# EAGLE board topboard (EAGLE 8.5.0)
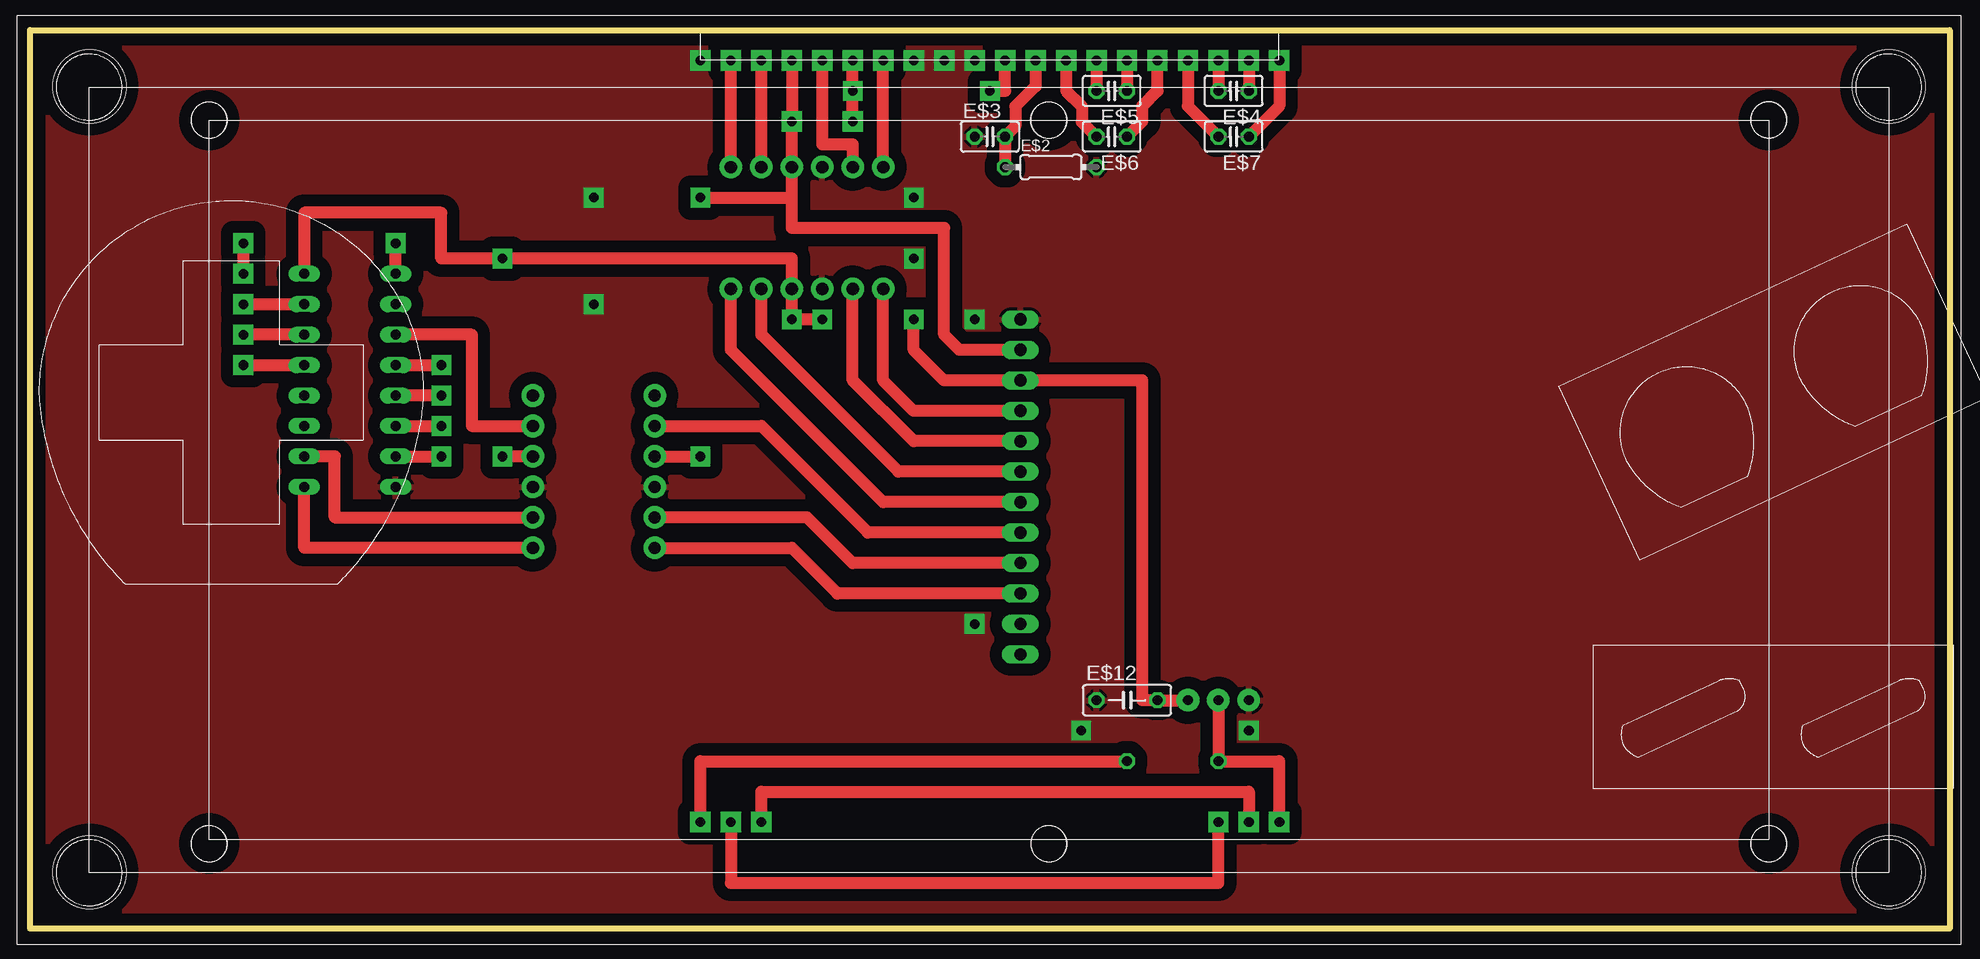
[diagram p0: board, top side]
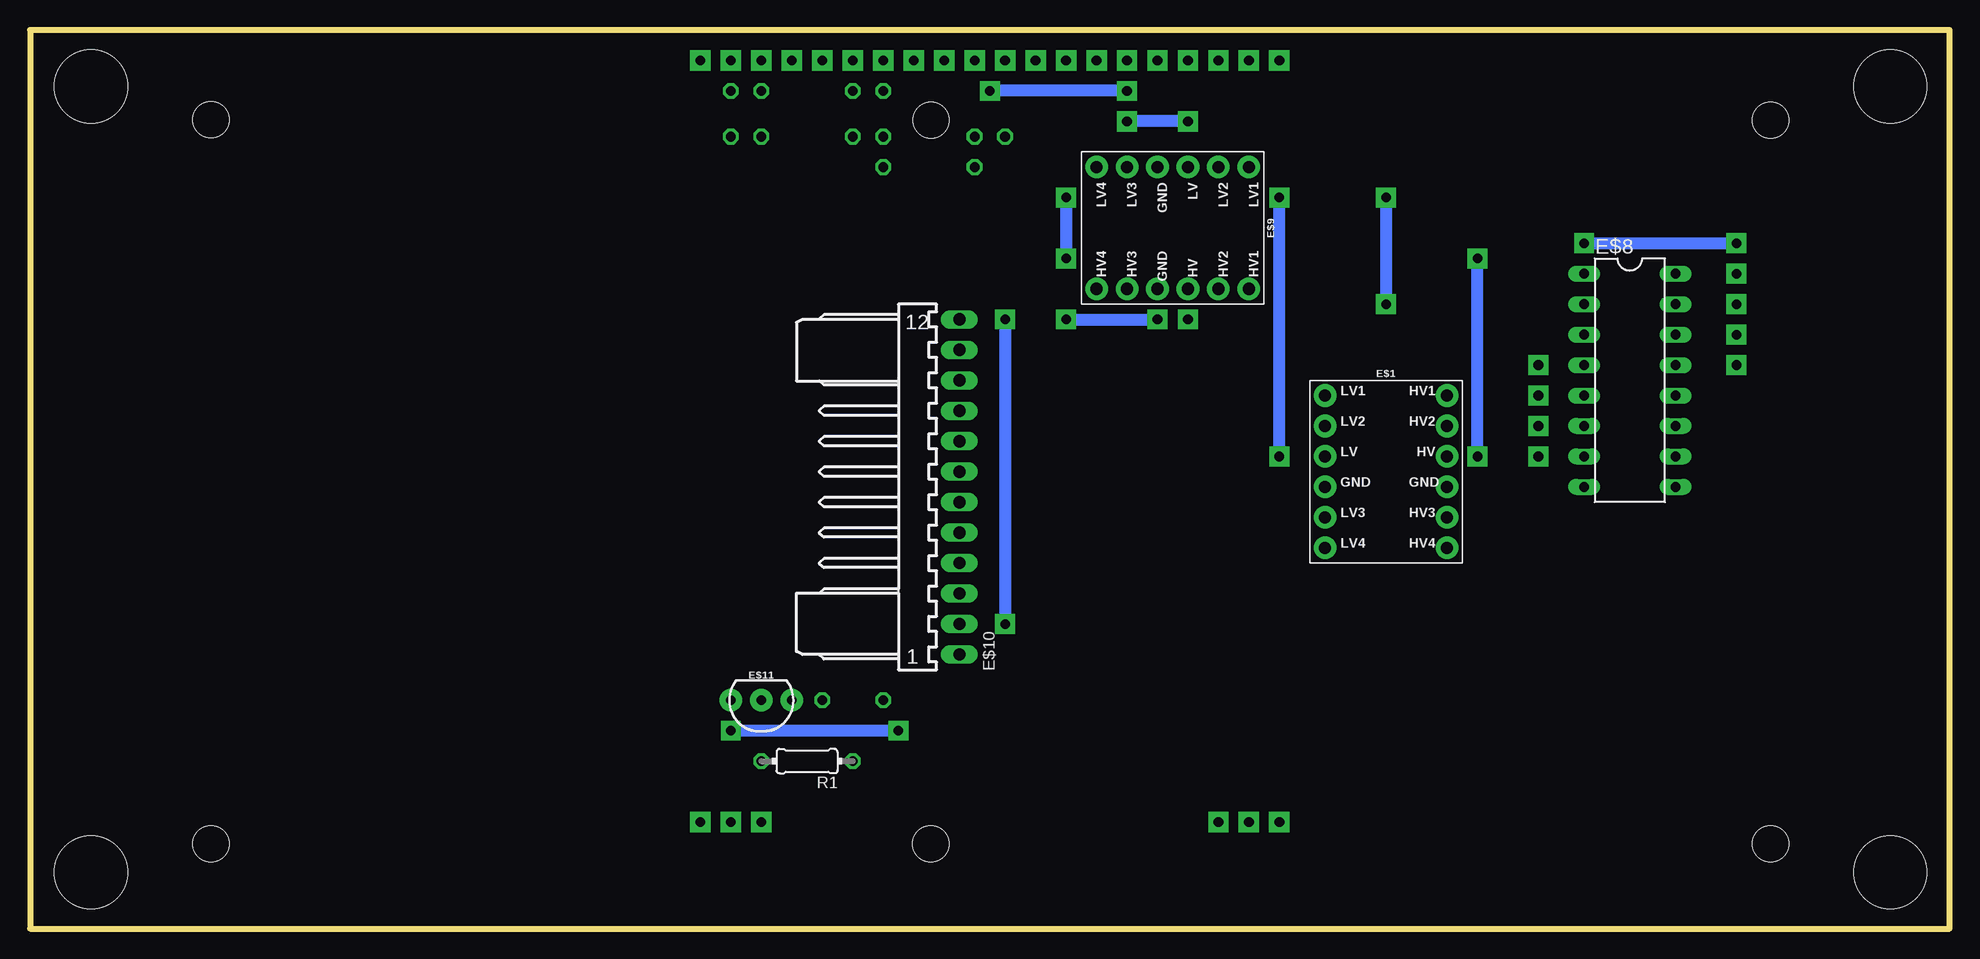
[diagram p1: board, bottom side, seen from below]

Size 160.02 x 74.93 mm. Coordinates in mm from the lower left corner, seen from the top.
Outline: 0,74.93 160.02,74.93 160.02,0 0,0 0,74.93
Copper layers (1*16): Top 0.035mm / dielectric 1.5mm / Bottom 0.035mm
Design rules "default *": minimum track width 6mil, minimum drill 0.35mm, track to track 10mil, track to pad 10mil, pad to pad 10mil, via to via 10mil, smd to smd 10mil, copper to edge 30mil, drill to drill 10mil, minimum pad ring 10mil, minimum via ring 8mil, stop-mask expansion 4mil, vias tented up to drill 0mil, thermal gap 10mil
Holes 6.1 mm at 4.95,70.23 154.94,70.23 154.94,4.7 4.95,4.7
Holes 3 mm at 14.94,67.41 14.94,7.09 84.94,7.09 144.93,7.09 144.93,67.44 84.91,67.41

## Footprints (pad centres in the part's own frame; a part is rotated, then mirrored left to right if it is on the bottom)
SPARKFUN_LOGIC_LEVEL_CONVERTER = drill 1.016 pad 1.88: GND1 -5.08,-1.27; GND2 5.08,-1.27; HV 5.08,1.27; HV1 5.08,6.35; HV2 5.08,3.81; HV3 5.08,-3.81; HV4 5.08,-6.35; LV -5.08,1.27; LV1 -5.08,6.35; LV2 -5.08,3.81; LV3 -5.08,-3.81; LV4 -5.08,-6.35
0204/7 = drill 0.813 octagon: 1 -3.81,0; 2 3.81,0
C025-025X050 = drill 0.813 octagon: 1 -1.27,0; 2 1.27,0
DIL16 = drill 0.813 long: 1 -8.89,-3.81; 2 -6.35,-3.81; 3 -3.81,-3.81; 4 -1.27,-3.81; 5 1.27,-3.81; 6 3.81,-3.81; 7 6.35,-3.81; 8 8.89,-3.81; 9 8.89,3.81; 10 6.35,3.81; 11 3.81,3.81; 12 1.27,3.81; 13 -1.27,3.81; 14 -3.81,3.81; 15 -6.35,3.81; 16 -8.89,3.81
7395-12 = drill 1.016 long: 1 13.97,0; 2 11.43,0; 3 8.89,0; 4 6.35,0; 5 3.81,0; 6 1.27,0; 7 -1.27,0; 8 -3.81,0; 9 -6.35,0; 10 -8.89,0; 11 -11.43,0; 12 -13.97,0
TO-92-AMMO = drill 0.813 pad 1.88: 1 -2.54,0; 2 0,0; 3 2.54,0
C050-025X075 = drill 0.813 octagon: 1 -2.54,0; 2 2.54,0

## Placement (x,y rotation side)
E$1  [SPARKFUN_LOGIC_LEVEL_CONVERTER]  46.99,38.1 0 bottom
E$2  [0204/7]  85.09,63.5 0 top
E$3  [C025-025X050]  80.01,66.04 0 top
E$4  [C025-025X050]  100.33,69.85 180 top
E$5  [C025-025X050]  90.17,69.85 180 top
E$6  [C025-025X050]  90.17,66.04 180 top
E$7  [C025-025X050]  100.33,66.04 180 top
E$8  [DIL16]  26.67,45.72 270 bottom
E$9  [SPARKFUN_LOGIC_LEVEL_CONVERTER]  64.77,58.42 270 bottom
E$10  [7395-12]  82.55,36.83 270 bottom
E$11  [TO-92-AMMO]  99.06,19.05 180 bottom
E$12  [C050-025X075]  91.44,19.05 0 top
R1  [0204/7]  95.25,13.97 180 bottom

## Library data of the parts
E$1 E$9 = SparkFun-Boards
E$2-E$7 E$12 R1 = BeagleBone_Black_Wireless
E$8 = 40xx
E$10 = con-molex
E$11 = SparkFun-Sensors

## Nets
+3V: E$1.LV E$9.LV E$10.11
+5V: E$1.HV E$8.16 E$9.HV E$10.10 E$11.1 E$12.2
CD: E$9.LV4
CD_3V: E$9.HV4 E$10.9
CLK: E$9.LV2
CS: E$9.LV3
CS_3V: E$9.HV3 E$10.8
GND: E$1.GND1 E$1.GND2 E$2.2 E$3.1 E$8.8 E$9.GND1 E$9.GND2 E$10.12 E$11.3 E$12.1
RCLK: E$1.HV4 E$8.9
RCLK_3V: E$1.LV4 E$10.3
S$1: E$2.1 E$3.2
S$2: E$8.15
S$3: E$8.14
S$4: E$8.13
S$5: E$8.1
S$6: E$11.2 R1.2
S$7: E$8.4
S$8: E$8.5
S$10: E$8.6
S$11: E$8.7
S$14: E$6.2
S$15: E$5.2
S$16: E$5.1
S$17: E$6.1
S$18: E$7.2
S$19: E$4.2
S$20: E$4.1
S$21: E$7.1
S$25: R1.1
SCK_3V: E$9.HV2 E$10.7
SDO_3V: E$9.HV1 E$10.6
SER: E$1.HV2 E$8.3
SER_3V: E$1.LV2 E$10.5
SI: E$9.LV1
SRCLK: E$1.HV3 E$8.10
SRCLK_3V: E$1.LV3 E$10.4

## Tracks (layer width: path | path; a pad name or v marks a point on that pad's centre or on a via)
+3V  (via drill 0.8 pad 1.65, 0.81 pad 1.7)
  Top 1.016: v68.58,67.31 v68.58,69.85 v68.58,72.39 | v63.5,72.39 v63.5,67.31 E$9.LV 63.5,60.96 | E$10.11 77.47,48.26 76.2,49.53 76.2,58.42 63.5,58.42 63.5,60.96 | v80.01,69.85 81.28,69.85 v81.28,72.39 | E$1.LV v55.88,39.37 | v55.88,60.96 63.5,60.96
  Bottom 1.016: v63.5,67.31 v68.58,67.31 | v68.58,69.85 v80.01,69.85 | v55.88,39.37 v55.88,60.96
+5V  (via drill 0.8 pad 1.65)
  Top 1.016: v73.66,50.8 73.66,48.26 76.2,45.72 E$10.10 92.71,45.72 92.71,19.05 E$12.2 E$11.1 | v66.04,50.8 v63.5,50.8 E$9.HV 63.5,55.88 v39.37,55.88 34.29,55.88 34.29,59.69 22.86,59.69 E$8.16 | E$1.HV v39.37,39.37
  Bottom 1.016: v73.66,50.8 v66.04,50.8 | v39.37,39.37 v39.37,55.88
CD  (via drill 0.81 pad 1.7)
  Top 1.016: E$9.LV4 v71.12,72.39
CD_3V
  Top 1.016: E$10.9 73.66,43.18 71.12,45.72 E$9.HV4
CLK  (via drill 0.81 pad 1.7)
  Top 1.016: E$9.LV2 v60.96,72.39
CS  (via drill 0.81 pad 1.7)
  Top 1.016: v66.04,72.39 66.04,65.41 68.58,65.41 E$9.LV3
CS_3V
  Top 1.016: E$10.8 73.66,40.64 68.58,45.72 E$9.HV3
GND  (via drill 0.8 pad 1.65, 0.81 pad 1.7)
  Bottom 1.016: v73.66,60.96 v73.66,55.88 | v78.74,50.8 v78.74,25.4 | v87.63,16.51 v101.6,16.51 | v46.99,60.96 v46.99,52.07
  other vias: 78.74,72.39 76.2,72.39 55.88,72.39 73.66,72.39
  pour Top (isolate 1.016, rank 3): -1.27,76.2 -1.27,-1.27 161.29,-1.27 161.29,76.2
RCLK
  Top 1.016: E$8.9 22.86,31.75 E$1.HV4
RCLK_3V
  Top 1.016: E$10.3 67.31,27.94 63.5,31.75 E$1.LV4
S$1  (via drill 0.81 pad 1.7)
  Top 1.016: v83.82,72.39 83.82,70.23 82.14,68.56 82.14,66.9 E$3.2 E$2.1
S$2  (via drill 0.8 pad 1.65)
  Top 1.016: v17.78,52.07 E$8.15
S$3  (via drill 0.8 pad 1.65)
  Top 1.016: E$8.14 v17.78,49.53
S$4  (via drill 0.8 pad 1.65)
  Top 1.016: v17.78,46.99 E$8.13
S$5  (via drill 0.8 pad 1.65)
  Top 1.016: E$8.1 v30.48,57.15 | v17.78,57.15 v17.78,54.61
  Bottom 1.016: v30.48,57.15 v17.78,57.15
S$6  (via drill 0.81 pad 1.7)
  Top 1.016: v104.14,8.89 104.14,13.97 R1.2 E$11.2
S$7  (via drill 0.8 pad 1.65)
  Top 1.016: E$8.4 v34.29,46.99
S$8  (via drill 0.8 pad 1.65)
  Top 1.016: v34.29,44.45 E$8.5
S$10  (via drill 0.8 pad 1.65)
  Top 1.016: E$8.6 v34.29,41.91
S$11  (via drill 0.8 pad 1.65)
  Top 1.016: E$8.7 v34.29,39.37
S$14  (via drill 0.81 pad 1.7)
  Top 1.016: v86.36,72.39 86.36,69.88 87.68,68.56 87.68,67.26 E$6.2
S$15  (via drill 0.81 pad 1.7)
  Top 1.016: v88.9,72.39 E$5.2
S$16  (via drill 0.81 pad 1.7)
  Top 1.016: v91.44,72.39 E$5.1
S$17  (via drill 0.81 pad 1.7)
  Top 1.016: E$6.1 92.71,67.31 92.71,68.58 93.98,69.85 v93.98,72.39
S$18  (via drill 0.81 pad 1.7)
  Top 1.016: v96.52,72.39 96.52,68.58 E$7.2
S$19  (via drill 0.81 pad 1.7)
  Top 1.016: v99.06,72.39 E$4.2
S$20  (via drill 0.81 pad 1.7)
  Top 1.016: v101.6,72.39 E$4.1
S$21  (via drill 0.81 pad 1.7)
  Top 1.016: v104.14,72.39 104.14,68.58 E$7.1
S$23  (via drill 0.81 pad 1.7)
  Top 1.016: v60.96,8.89 60.96,11.43 101.6,11.43 v101.6,8.89
S$25  (via drill 0.81 pad 1.7)
  Top 1.016: v55.88,8.89 55.88,13.97 R1.1
S$46  (via drill 0.81 pad 1.7)
  Top 1.016: v58.42,8.89 58.42,3.81 99.06,3.81 v99.06,8.89
SCK_3V
  Top 1.016: E$10.7 72.39,38.1 60.96,49.53 E$9.HV2
SDO_3V
  Top 1.016: E$10.6 71.12,35.56 58.42,48.26 E$9.HV1
SER
  Top 1.016: E$8.3 36.83,49.53 36.83,41.91 E$1.HV2
SER_3V
  Top 1.016: E$10.5 69.85,33.02 60.96,41.91 E$1.LV2
SI  (via drill 0.81 pad 1.7)
  Top 1.016: E$9.LV1 v58.42,72.39
SRCLK
  Top 1.016: E$8.10 25.4,39.37 25.4,34.29 E$1.HV3
SRCLK_3V
  Top 1.016: E$10.4 68.58,30.48 64.77,34.29 E$1.LV3